# EAGLE board Shift Register PCB (EAGLE 9.7.0)
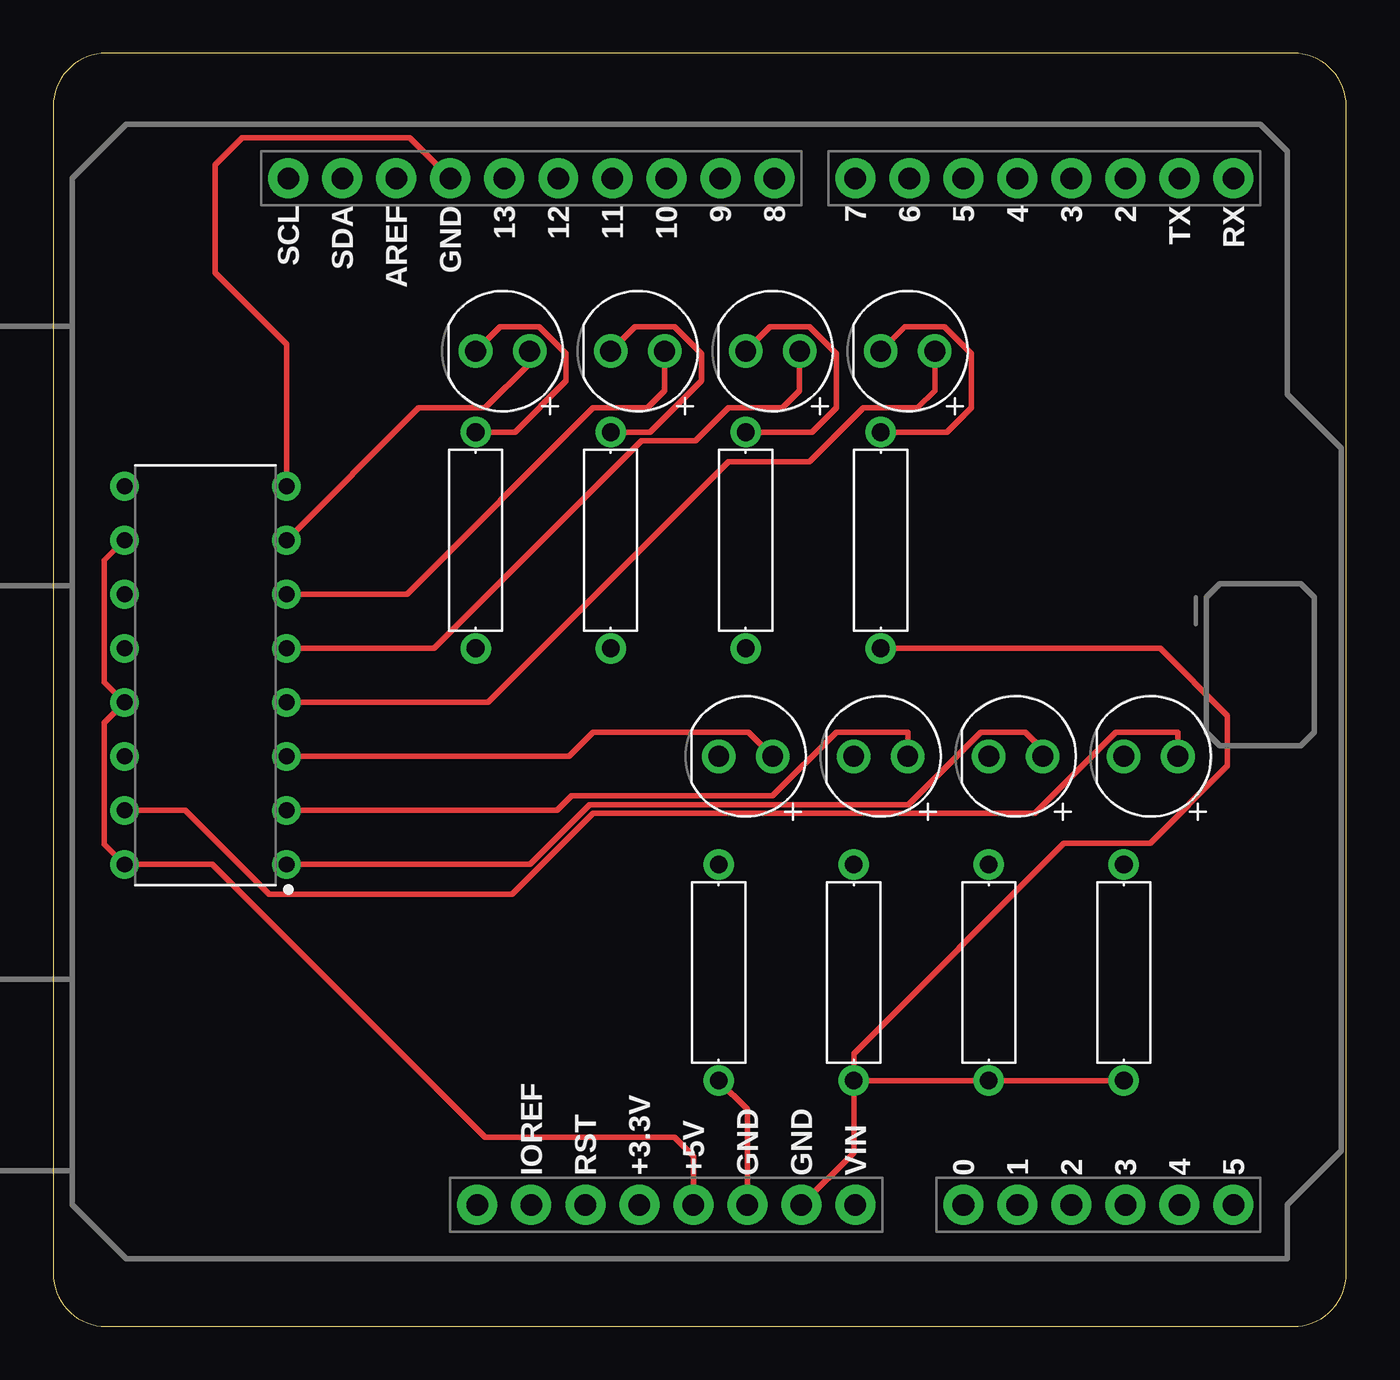
[diagram p0: board, top side]
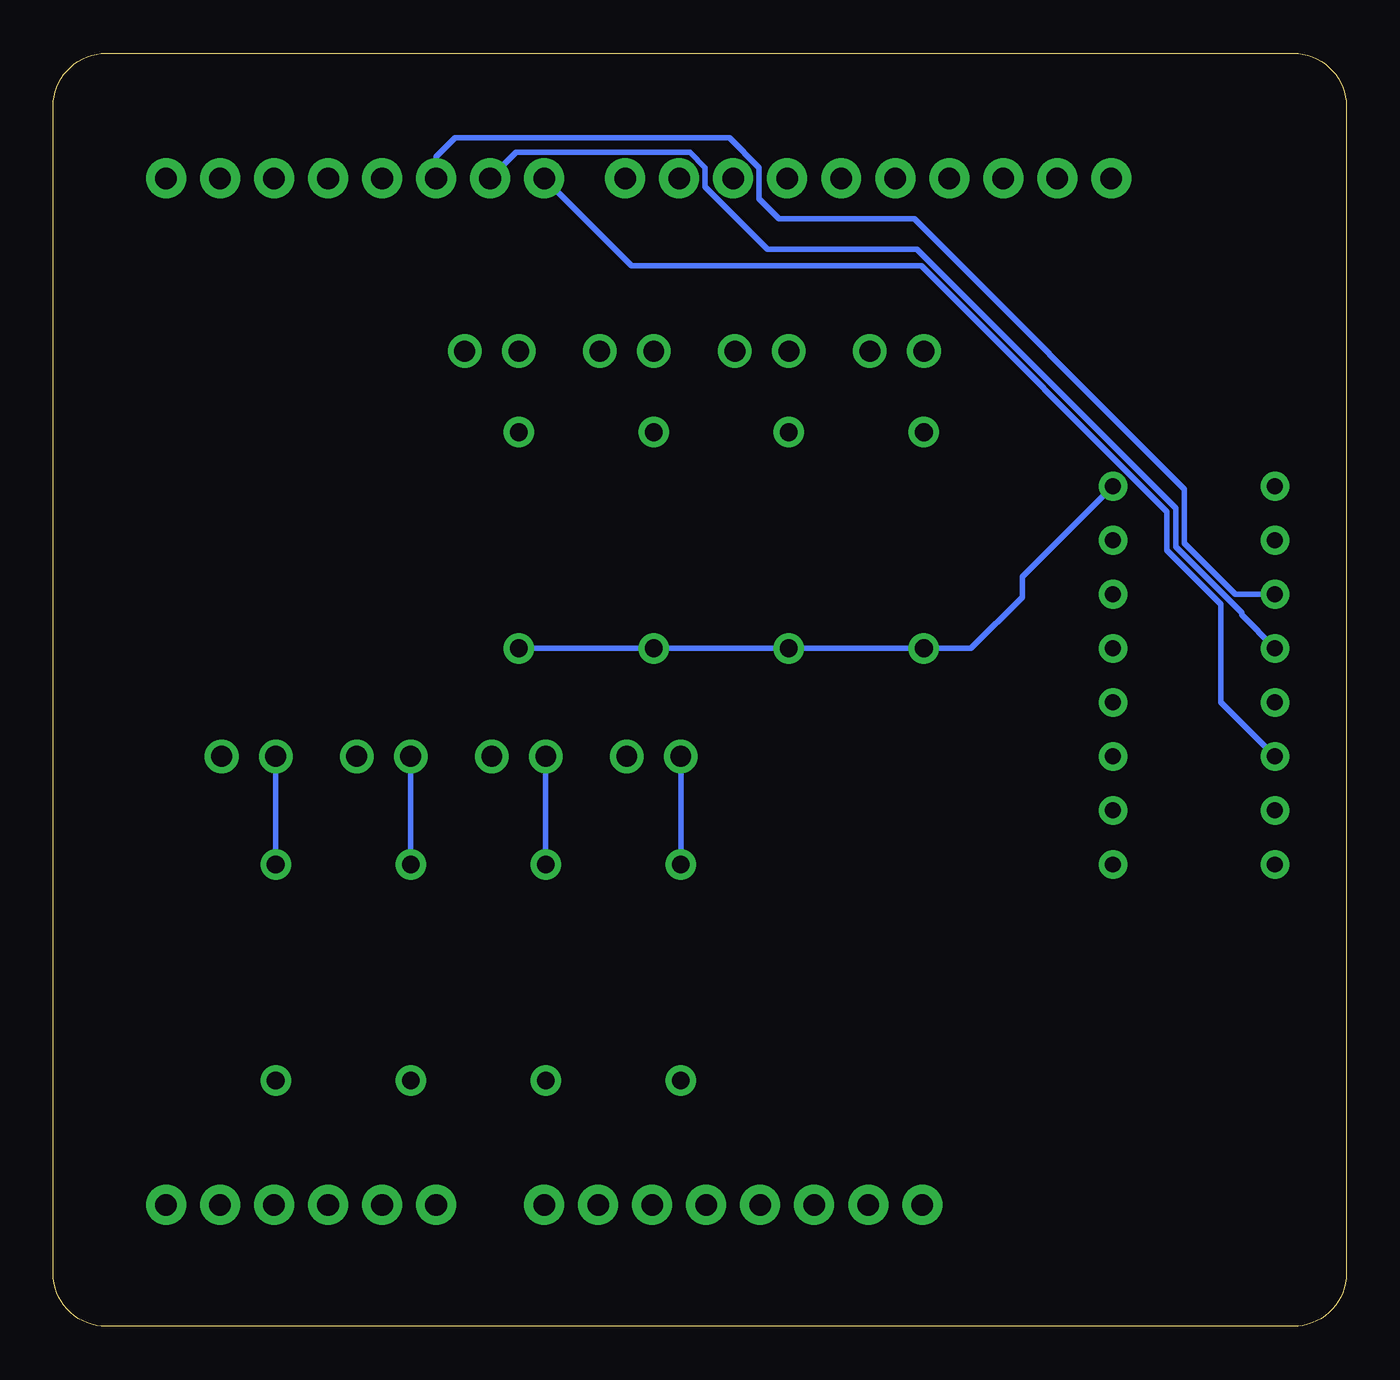
[diagram p1: board, bottom side, seen from below]

Size 60.81 x 59.86 mm. Coordinates in mm from the lower left corner, seen from the top.
Outline: 0,2.5 arc90 2.5,0 58.31,0 arc90 60.81,2.5 60.81,57.36 arc90 58.31,59.86 2.5,59.86 arc90 0,57.36 0,2.5
Copper layers (1*16): Top 0.035mm / dielectric 1.5mm / Bottom 0.035mm
Design rules "default": minimum track width 6mil, minimum drill 0.35mm, track to track 6mil, track to pad 6mil, pad to pad 6mil, via to via 6mil, smd to smd 6mil, copper to edge 40mil, drill to drill 6mil, minimum pad ring 10mil, minimum via ring 8mil, stop-mask expansion 4mil, vias tented up to drill 0mil, thermal gap 10mil

## Footprints (pad centres in the part's own frame; a part is rotated, then mirrored left to right if it is on the bottom)
LEDRD254W60D565H860B = drill 0.981 pad 1.581: 1 -1.27,0; 2 1.27,0
RESAD1016W63L850D250B = drill 0.83 pad 1.43: 1 -5.08,0; 2 5.08,0
ARDUINO-UNO-R3-SHIELD = drill 1.016 pad 1.88: 3.3V 24.13,-2.54; 5V 24.13,0; A0 24.13,12.7; A1 24.13,15.24; A2 24.13,17.78; A3 24.13,20.32; A4 24.13,22.86; A5 24.13,25.4; AREF -24.13,-13.97; D2 -24.13,20.32; D3 -24.13,17.78; D4 -24.13,15.24; D5 -24.13,12.7; D6 -24.13,10.16; D7 -24.13,7.62; D8 -24.13,3.81; D9 -24.13,1.27; D10 -24.13,-1.27; D11 -24.13,-3.81; D12 -24.13,-6.35; D13 -24.13,-8.89; GND@0 24.13,2.54; GND@1 24.13,5.08; GND@2 -24.13,-11.43; IOREF 24.13,-7.62; NC 24.13,-10.16; RES 24.13,-5.08; RX -24.13,25.4; SCL -24.13,-19.05; SDA -24.13,-16.51; TX -24.13,22.86; VIN 24.13,7.62
DIP762W53P254L1969H508Q16B = drill 0.743 pad 1.343: 1 -3.81,8.89; 2 -3.81,6.35; 3 -3.81,3.81; 4 -3.81,1.27; 5 -3.81,-1.27; 6 -3.81,-3.81; 7 -3.81,-6.35; 8 -3.81,-8.89; 9 3.81,-8.89; 10 3.81,-6.35; 11 3.81,-3.81; 12 3.81,-1.27; 13 3.81,1.27; 14 3.81,3.81; 15 3.81,6.35; 16 3.81,8.89

## Placement (x,y rotation side)
D1  RED  [LEDRD254W60D565H860B]  21.14,45.85 180 top
D2  RED  [LEDRD254W60D565H860B]  27.49,45.85 180 top
D3  RED  [LEDRD254W60D565H860B]  33.84,45.85 180 top
D4  RED  [LEDRD254W60D565H860B]  40.19,45.85 180 top
D5  RED  [LEDRD254W60D565H860B]  32.57,26.8 180 top
D6  RED  [LEDRD254W60D565H860B]  38.92,26.8 180 top
D7  RED  [LEDRD254W60D565H860B]  45.27,26.8 180 top
D8  RED  [LEDRD254W60D565H860B]  51.62,26.8 180 top
R1  1k  [RESAD1016W63L850D250B]  19.87,36.96 90 top
R2  1k  [RESAD1016W63L850D250B]  26.22,36.96 90 top
R3  1k  [RESAD1016W63L850D250B]  32.57,36.96 90 top
R4  1k  [RESAD1016W63L850D250B]  38.92,36.96 90 top
R5  1k  [RESAD1016W63L850D250B]  31.3,16.64 90 top
R6  1k  [RESAD1016W63L850D250B]  37.65,16.64 90 top
R7  1k  [RESAD1016W63L850D250B]  44,16.64 90 top
R8  1k  [RESAD1016W63L850D250B]  50.35,16.64 90 top
U1  ARDUINO-UNO-R3-SHIELD  [ARDUINO-UNO-R3-SHIELD]  30.1,29.84 270 top
U2  74HC595_PDIP  [DIP762W53P254L1969H508Q16B]  7.17,30.61 180 top

## Library data of the parts
D1-D8 = Tinkercad; CATEGORY: Opto-Electronic; SUB-CATEGORY: LED; VALUE: LED_RED
R1-R8 U1 U2 = Tinkercad

## Nets
D1_C: D1.2 R1.2
D2_C: D2.2 R2.2
D3_C: D3.2 R3.2
D4_C: D4.2 R4.2
D5_C: D5.2 R5.2
D6_C: D6.2 R6.2
D7_C: D7.2 R7.2
D8_C: D8.2 R8.2
S$1: R5.1 U1.GND@0
U1_5V: U1.5V U2.10 U2.13 U2.16
U1_D5: U1.D5 U2.11
U1_D6: U1.D6 U2.12
U1_D7: U1.D7 U2.14
U1_GND: R1.1 R2.1 R3.1 R4.1 R6.1 R7.1 R8.1 U1.GND@1 U1.GND@2 U2.8
U2_Q0: D8.1 U2.15
U2_Q1: D7.1 U2.1
U2_Q2: D6.1 U2.2
U2_Q3: D5.1 U2.3
U2_Q4: D4.1 U2.4
U2_Q5: D3.1 U2.5
U2_Q6: D2.1 U2.6
U2_Q7: D1.1 U2.7

## Tracks (layer width: path | path; a pad name or v marks a point on that pad's centre or on a via)
D1_C
  Top 0.254: D1.2 21.01,46.99 22.86,46.99 24.13,45.72 24.13,44.45 21.72,42.04 R1.2
D2_C
  Top 0.254: D2.2 27.36,46.99 29.21,46.99 30.48,45.72 30.48,44.45 28.07,42.04 R2.2
D3_C
  Top 0.254: D3.2 33.71,46.99 35.56,46.99 36.83,45.72 36.83,43.18 35.69,42.04 R3.2
D4_C
  Top 0.254: D4.2 40.06,46.99 41.91,46.99 43.18,45.72 43.18,43.18 42.04,42.04 R4.2
D5_C
  Bottom 0.254: R5.2 D5.2
D6_C
  Bottom 0.254: D6.2 R6.2
D7_C
  Bottom 0.254: D7.2 R7.2
D8_C
  Bottom 0.254: D8.2 R8.2
S$1
  Top 0.254: R5.1 32.64,10.21 U1.GND@0
U1_5V
  Top 0.254: U1.5V 30.1,8 29.21,8.89 20.32,8.89 7.49,21.72 U2.16 2.41,22.67 2.41,28.39 U2.13 2.41,30.29 2.41,36.01 U2.10
U1_D5
  Bottom 0.254: U2.11 5.21,34.42 7.62,36.83 7.62,39.37 20.32,52.07 26.67,52.07 27.62,53.02 27.62,54.48 29.02,55.88 41.91,55.88 42.8,54.98 U1.D5
U1_D6
  Bottom 0.254: U1.D6 39.05,55.19 30.87,55.19 30.16,54.48 30.16,53.57 27.22,50.64 20.19,50.64 8.03,38.47 8.03,36.66 4.92,33.56 4.92,33.45 U2.12
U1_D7
  Bottom 0.254: U1.D7 33.6,49.85 19.98,49.85 8.43,38.3 8.43,36.49 5.9,33.96 5.9,29.34 U2.14
U1_GND
  Top 0.254: U2.8 10.98,46.17 7.62,49.53 7.62,54.61 8.89,55.88 16.77,55.88 U1.GND@2 | R6.1 37.65,8.18 U1.GND@1 | R6.1 R7.1 R8.1 | R4.1 52.06,31.88 55.23,28.71 55.23,26.36 51.58,22.71 47.53,22.71 37.65,12.83 R6.1
  Bottom 0.254: U2.8 15.24,35.24 15.24,34.29 17.65,31.88 R1.1 R2.1 R3.1 R4.1
U2_Q0
  Top 0.254: U2.15 6.22,24.26 10.16,20.32 21.59,20.32 25.4,24.13 46.16,24.13 49.97,27.94 52.89,27.94 D8.1
U2_Q1
  Top 0.254: D7.1 46.54,27.12 45.72,27.94 43.62,27.94 40.22,24.54 25.23,24.54 22.42,21.72 U2.1
U2_Q2
  Top 0.254: D6.1 40.19,27.94 36.83,27.94 33.83,24.94 24.37,24.94 23.69,24.26 U2.2
U2_Q3
  Top 0.254: U2.3 24.26,26.8 25.4,27.94 32.7,27.94 D5.1
U2_Q4
  Top 0.254: U2.4 20.45,29.34 31.75,40.64 35.56,40.64 38.1,43.18 40.64,43.18 41.46,44 D4.1
U2_Q5
  Top 0.254: U2.5 17.91,31.88 27.66,41.63 30.2,41.63 31.75,43.18 34.29,43.18 35.11,44 D3.1
U2_Q6
  Top 0.254: U2.6 16.64,34.42 25.4,43.18 27.94,43.18 28.76,44 D2.1
U2_Q7
  Top 0.254: U2.7 17.2,43.18 20.32,43.18 22.41,45.27 D1.1